# Altium PCB Health_module.PcbDoc
Units mm, origin at the board's own origin, x right, y up, seen from the top; angles counter-clockwise.
Board outline 18 x 33 mm, 2 copper layers (Top Layer, Bottom Layer); 29 components, 19 nets, 115 pads, 15 vias.
Unrouted connection lines stored in the file: 5.
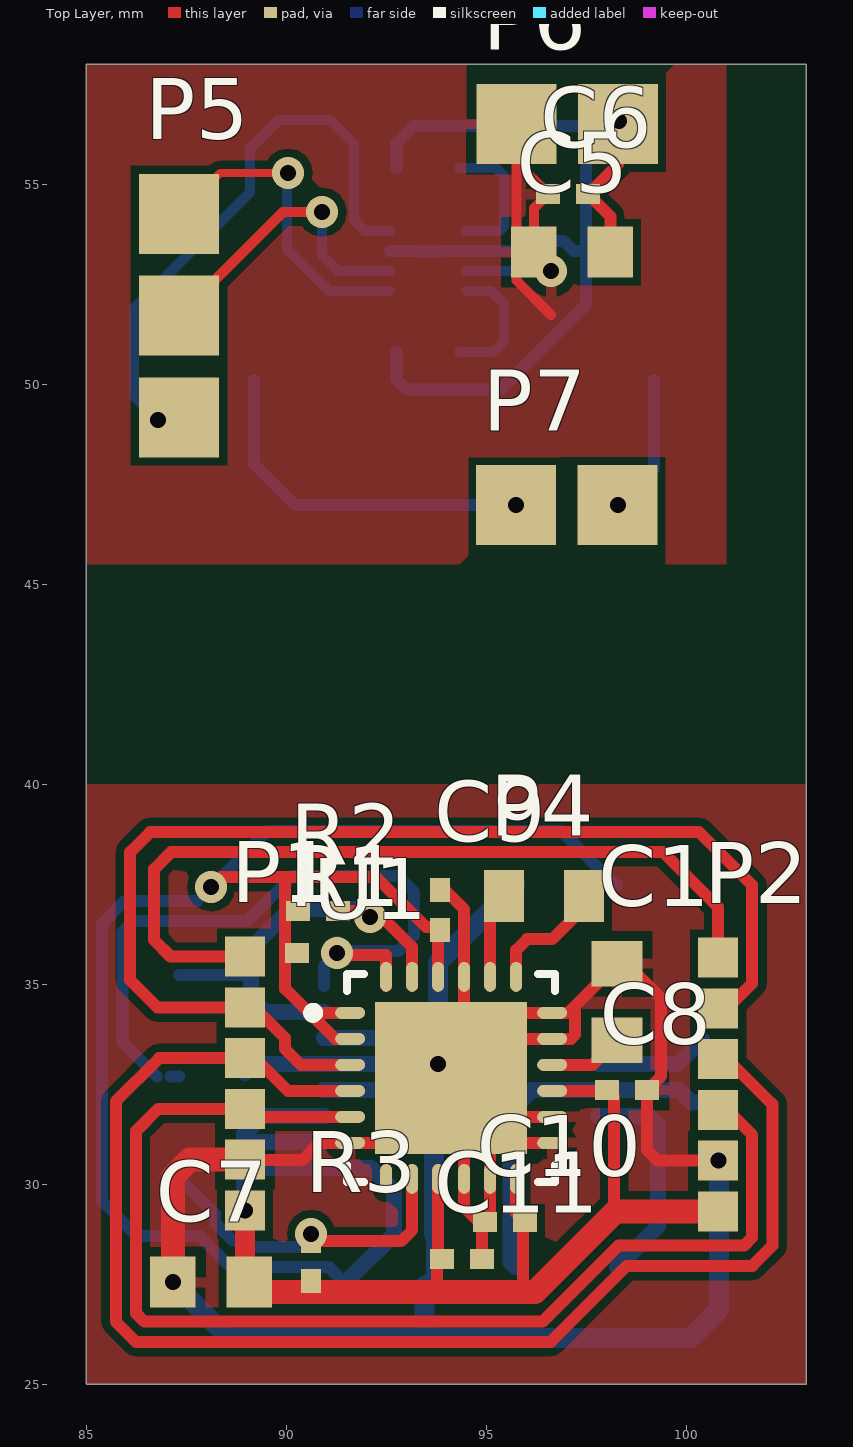
[diagram p0: Top Layer view]
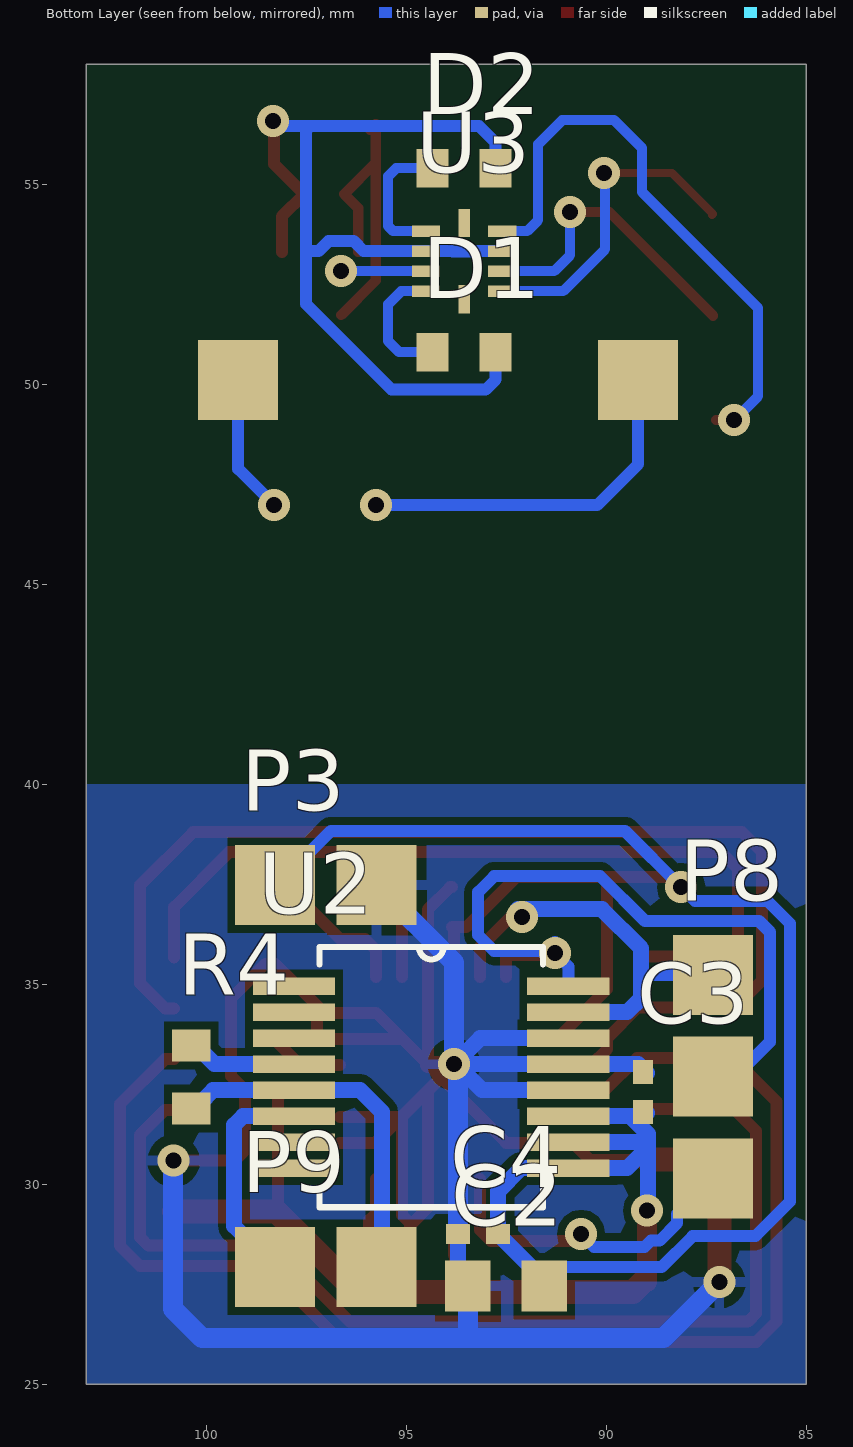
[diagram p1: Bottom Layer view, seen from below]

## Layer stack, top to bottom
Top Layer: signal copper 0.0356
Dielectric: dielectric 0.32, FR-4, Dk 4.8
Bottom Layer: signal copper 0.0356

## Board outline
85,58 103,58 103,25 85,25

## Design rules (kind name [scope] priority, off if disabled: settings)
Clearance [All] p1: gap=0.203
HoleSize [All] p1: absolutevalues=TRUE maxlimit=5 minlimit=0.3 maxpercent=80.000 minpercent=20.000
MinimumSolderMaskSliver [All] p1: minsoldermaskwidth=0
PolygonConnect [All] p1: connectstyle=Relief reliefconductorwidth=0.254 reliefentries=4 polygonreliefangle="90 Angle" airgapwidth=0.254
RoutingVias [All] p1: holewidth=0.4 width=0.8 viastyle="Through Hole" minholewidth=0.3 minwidth=0.6 maxholewidth=5 maxwidth=6
SilkToSilkClearance [All] p1: silktosilkclearance=0
SilkToSolderMaskClearance [IsPad] p1: minsilkscreentomaskgap=0 clearancetoexposedcopper=TRUE
SolderMaskExpansion [All] p1: expansion=0.051
Width [All] p1: maxlimit=3 minlimit=0.203 preferedwidth=0.3
24 further rules are at their usual default settings.

## Components (designator, comment, footprint, x,y, rotation, side; value= is the part's Value field where it differs from the comment)
C1 "10u" 0805 98.275,34.55 r270 top
C2 "10u" 0805 92.5,27.45 r180 bottom
C3 "Cap Semi" 0402 89.075,32.3 r270 bottom
C4 "Cap Semi" 0402 93.2,28.75 r180 bottom
C5 "10u" 0805 97.15,53.3 r0 top
C6 "Cap Semi" 0402 97.05,54.75 r0 top
C7 "10u" 0805 88.125,27.55 r0 top
C8 "Cap Semi" 0402 98.525,32.35 r180 top
C9 "Cap Semi" 0402 93.85,36.85 r270 top
C10 "Cap Semi" 0402 95.475,29.05 r0 top
C11 "Cap Semi" 0402 94.4,28.125 r180 top
D1 "IR" 0603 93.55,50.8 r0 bottom
D2 "RED" 0603 93.55,55.4 r0 bottom
P1 "InputConn" Goldpin6_1.27mm 88.975,33.15 r0 top
P2 "OutputConn" Goldpin6_1.27mm 100.8,33.125 r0 top
P3 "Sensor_board_supply" 2pinConn_2mmSquare_2.54mmSpaced 98.3,37.5 r90 bottom
P4 "Programming" GeckoProgramming 95.45,37.2 r0 top
P5 "PulseOximeter_conn" 3pinConn_2mmSquare_2.54spaced 87.325,54.25 r0 top
P6 "Sensor_board_supply" 2pinConn_2mmSquare_2.54mmSpaced 98.325,56.475 r270 top
P7 "AD5933_conn" 2pinConn_2mmSquare_2.54mmSpaced 95.725,47 r90 top
P8 "PulseOximeter_conn" 3pinConn_2mmSquare_2.54spaced 87.325,35.225 r180 bottom
P9 "AD5933_conn" 2pinConn_2mmSquare_2.54mmSpaced 98.3,27.95 r90 bottom
R1 "Res2" 0402 90.775,35.775 r180 top
R2 "Res2" 0402 90.8,36.825 r180 top
R3 "Res2" 0402 90.625,28.075 r270 top
R4 "Res2" 0603 100.375,32.675 r270 bottom
U1 "EFM32ZG110" QFN24_5x5_0.65 94.175,32.65 r0 top
U2 "AD5933" SSOP16 94.525,32.875 r180 bottom
U3 "Si1143" Si1143 93.55,53.025 r0 bottom

## Footprints (in the part's own frame and the unit in brackets; to place one, negate y for a bottom-side part, rotate by r counter-clockwise, add the part's x,y. Pads: shape width x height; smd on the part's side, far side on the other; paste and mask are expansions set on the pad)
2pinConn_2mmSquare_2.54mmSpaced [mm]
  rect 2x2 smd: 1(-0.025,-0.025) 2(-0.025,-2.565)
3pinConn_2mmSquare_2.54spaced [mm]
  rect 2x2 smd: 1(0,0) 2(0,-2.54) 3(0,-5.08)
0402 [mm] "Chip Capacitor, Body 1.0x0.5mm, IPC High Density"
  rect 0.6x0.5 smd: 1(-0.5,0) 2(0.5,0)
  body extent -0.55,-0.3 0.55,0.3, height 1.3
0603 [mm]
  rect 0.8x0.965 smd: 1(-0.787,0) 2(0.788,0)
0805 [mm]
  rect 1.14x1.27 smd: 1(-0.955,0) 2(0.955,0)
GeckoProgramming [mm]
  rect 1x1.3 smd: 1(0,0) 2(2,0)
Goldpin6_1.27mm [mm]
  rect 1x1 smd: 1(0,-3.81) 2(0,-2.54) 3(0,-1.27) 4(0,0) 5(0,1.27) 6(0,2.54)
QFN24_5x5_0.65 [mm]
  oval 0.75x0.3 smd: 1(-2.575,1.631) 2(-2.575,0.981) 3(-2.575,0.331) 4(-2.575,-0.319) 5(-2.575,-0.969) 6(-2.575,-1.619) 13(2.475,-1.619) 14(2.475,-0.969) 15(2.475,-0.319) 16(2.475,0.331) 17(2.475,0.981) 18(2.475,1.631)
  oval 0.3x0.75 smd: 7(-1.675,-2.519) 8(-1.025,-2.519) 9(-0.375,-2.519) 10(0.275,-2.519) 11(0.925,-2.519) 12(1.575,-2.519) 19(1.575,2.531) 20(0.925,2.531) 21(0.275,2.531) 22(-0.375,2.531) 23(-1.025,2.531) 24(-1.675,2.531)
  rect 3.8x3.8 smd: 25(-0.05,0.006)
  silkscreen extent -3.62,-2.59 2.55,2.61, body extent -2.63,-2.57 2.53,2.58, height 1
Si1143 [mil]
  rect 28x11.42 smd: 1(-37.5,27.53) 2(-37.5,7.84) 3(-37.5,-11.84) 4(-37.5,-31.53) 6(37.5,-31.53) 7(37.5,-11.84) 8(37.5,7.84) 9(37.5,27.53)
  rect 11.42x28 smd: 5(0,-39.5) 10(0,35.5)
SSOP16 [mil]
  rect 81x17 smd: 1(-129,81.57) 2(-129,55.98) 3(-129,30.39) 4(-129,4.8) 5(-129,-20.8) 6(-129,-46.39) 7(-129,-71.98) 8(-129,-97.57) 9(141,-97.57) 10(141,-71.98) 11(141,-46.39) 12(141,-20.8) 13(141,4.8) 14(141,30.39) 15(141,55.98) 16(141,81.57)
  silkscreen extent -104,-136 116,120

## Part data
C1 C2 C5 C7: library part "Cap Semi", "Capacitor (Semiconductor SIM Model)"
C3 C4 C6 C8 C9 C10 C11: "Capacitor (Semiconductor SIM Model)"
D1 D2: library part LED0, "Typical INFRARED GaAs LED"
P1 P2: library part MHDR1X6, "Header, 6-Pin"
P3 P4 P6: library part MHDR1X2, "Header, 2-Pin"
P5 P8: library part "Header 3"
P7 P9: library part "Header 2", "Header, 2-Pin"
R1 R2 R3 R4: "Resistor"

## Free pads (board coordinates)
  rect 2x2 smd far side: 2(89.2,50.1) 3(99.2,50.1)

## Via types
v1: diameter 0.8, hole 0.4, Top Layer to Bottom Layer, 15 vias

## Nets (pads, with @x,y where several pads share a name; then routed paths per layer and width w, separated by ;. In a path a pad name is that pad's centre, name@x,y a point inside that pad or via, vN(x,y) a via of type N, cw(c..) or ccw(c..) an arc to the next point about the centre after c; other vN are vias at no path point)
+5V: P1.6 P2.6 | length 20.3
  Top Layer w0.3: P1.6 87.11,35.69 86.7,36.1 86.7,37.875 87.122,38.297 99.428,38.297 100.8,36.925 P2.6
AD5933_C1: P7.1 pad.2 | length 9.1
  Bottom Layer w0.3: pad.2 89.2,48 90.225,46.975 v1(95.75,46.975)
AD5933_C2: P7.2 pad.3 | length 3.5
  Bottom Layer w0.254: v1(98.3,46.984) v1@98.3,47
  Bottom Layer w0.3: v1(98.3,46.984) 99.2,47.884 pad.3
GND: C1.1 C2.1 C3.1 C4.1 C5.1 C6.1 C7.1 C8.1 C9.1 C10.1 C11.1 P1.2 P2.2 P3.2 P6.2 U1.6 U1.10 U1.11 U1.13 U1.14 U1.17 U1.18 U1.21 U1.25 U2.12 U2.13 U2.14 U3.8 | length 97.1
  Top Layer w0.254: P6.2@95.9,56.36 P6.2 P6.2@95.76,55.54 ; C5.1 96.195,54.395 C6.1 P6.2@95.76,55.54 ; 96.625,51.725 95.76,52.59 P6.2@95.76,55.54
  Top Layer w0.3: P1.2 88.985,30.6 90.4,30.6 90.831,31.031 U1.6 92.5,31.031 U1.25 ; v1(93.8,32.997) U1.25@94.133,32.664 ; C9.1@93.85,37.425 93.899,37.425 94.453,36.871 94.453,35.184 U1.21 U1.25@94.45,32.981 ; C11.1 94.9,28.975 C10.1@94.875,29 ; U1.13 95.766,31.031 U1.25@95.116,31.681 ; U1.14 U1.25@95.116,31.681 ; P2.2 99.29,30.585 99.025,30.85 C8.1 99.375,32.7 99.375,34.65 98.52,35.505 C1.1 97.225,34.455 ; U1.25 U1.25@94.45,32.331 ; U1.25 U1.25@94.133,32.664 ; U1.25@94.133,32.664 U1.25@94.45,32.981 ; U1.25@94.133,32.664 U1.25@95.116,31.681 ; U1.25@94.45,32.331 U1.10 94.45,29.425 C10.1@94.875,29 ; U1.25@94.45,32.331 95.1,31.681 U1.11 95.1,29.225 C10.1@94.875,29 ; U1.25@94.45,32.981 U1.25@95.1,33.631 ; U1.25@95.1,33.631 U1.17 97.119,33.631 97.225,33.737 97.225,34.455 ; U1.25@95.1,33.631 95.75,34.281 U1.18 97.051,34.281 97.225,34.455
  Top Layer w0.4: v1(93.8,32.997) 94.428,32.997 94.431,33 U1.25@94.45,32.981
  Top Layer w0.5: P2.2 v1(100.815,30.585)
  Top Layer w0.6: v1(87.17,27.55) 87.17,30.195 87.585,30.61 P1.2
  Bottom Layer w0.254: U3.8 95.876,52.826 ; 95.877,52.825 v1(96.625,52.825)
  Bottom Layer w0.4: C3.1@88.975,32.775 89.197,32.997 U2.13 v1@93.75,32.997 ; U2.12 93.1,32.347 v1@93.75,32.997 ; U2.14 93.15,33.647 v1(93.8,32.997) ; C2.1 93.7,27.695 C4.1 ; v1@93.7,32.897 v1(93.8,32.997) ; v1@93.75,32.997 v1(93.8,32.997)
  Bottom Layer w0.5: v1(87.17,27.55) 88.57,26.15 93.455,26.15 ; C2.1 93.455,26.15 ; C4.1 v1@93.7,32.897 ; v1(93.8,32.997) 93.8,35.54 P3.2 ; v1(100.815,30.585) 100.825,30.575 100.825,26.875 100.1,26.15 93.455,26.15
INT: P5.3 P8.3 R3.1 U1.8 U3.4 | length 23
  Top Layer w0.254: v1(86.8,49.1) P5.3@87.255,49.1
  Top Layer w0.3: R3.1 92.875,28.575 93.15,28.85 U1.8
  Bottom Layer w0.254: v1(86.8,49.1) 86.2,49.7 86.2,51.9 89.1,54.8 89.1,55.9 89.8,56.6 91.1,56.6 91.7,56 91.7,54.1 91.974,53.826 U3.4
  Bottom Layer w0.3: P8.3 88.222,29.248 88.222,29.028 88.663,28.587 88.883,28.587 89.045,28.425 90.3,28.425 v1(90.625,28.75) v1@90.6,28.775
MODCONND0: P1.5 P2.5 U1.3 | length 29.6
  Top Layer w0.3: U1.3 90.369,32.981 89.975,33.375 89.975,33.65 89.205,34.42 P1.5 86.78,34.42 86.1,35.1 86.1,38.3 86.6,38.8 100.325,38.8 101.653,37.472 101.653,35.019 101.03,34.395 P2.5
MODCONND1: P1.4 P2.4 U1.4 | length 35.1
  Top Layer w0.3: U1.4 90.044,32.331 89.225,33.15 P1.4 86.825,33.15 85.744,32.069 85.744,26.56 86.245,26.059 96.619,26.059 98.519,27.959 101.655,27.959 102.156,28.46 102.156,31.998 101.03,33.125 P2.4
MODCONND2: P1.3 P2.3 U1.5 | length 30.3
  Top Layer w0.3: U1.5 89.174,31.681 P1.3 86.805,31.88 86.247,31.322 86.247,26.769 86.454,26.562 96.411,26.562 98.311,28.462 101.446,28.462 101.653,28.669 101.653,31.231 101.03,31.855 P2.3
NetC1_2: C1.2 U1.16 | length 1.9
  Top Layer w0.3: U1.16 97.661,32.981 C1.2
NetD1_2: D1.2 U3.9 | length 3.2
  Bottom Layer w0.254: D1.2 95.175,50.8 95.45,51.075 95.45,52 95.124,52.326 U3.9
NetD2_2: D2.2 U3.6 | length 3.4
  Bottom Layer w0.254: D2.2 95.25,55.4 95.45,55.2 95.45,53.95 95.326,53.826 U3.6
NetP4_1: P4.1 U1.20 | length 2.2
  Top Layer w0.3: U1.20 95.1,36.85 P4.1
NetP4_2: P4.2 U1.19 | length 3.1
  Top Layer w0.3: U1.19 95.75,35.85 96.025,36.125 96.65,36.125 97.45,36.925 P4.2
NetP9_1: P9.1 U2.6 | length 5.6
  Bottom Layer w0.4: U2.6 99.078,31.697 99.303,31.472 99.303,28.953 P9.1
NetR4_1: R4.1 U2.4 | length 2.9
  Bottom Layer w0.4: U2.4 99.784,32.997 R4.1@100.4,33.612
SCL: P5.2 P8.2 R1.1 U1.24 U2.16 U3.2 | length 26.2
  Top Layer w0.254: P5.2 89.915,54.3 v1(90.9,54.3)
  Top Layer w0.3: v1(91.275,35.775) 91.25,35.8 91.25,35.725 92.5,35.725 U1.24
  Bottom Layer w0.254: v1(90.9,54.3) 90.9,53.225 91.299,52.826 U3.2
  Bottom Layer w0.3: P8.2@86.775,32.685 85.904,33.556 85.904,36.303 86.179,36.578 89.028,36.578 90.15,37.7 92.8,37.7 93.2,37.3 93.2,36.225 92.8,35.825 91.5,35.825 91.275,36.05 v1(91.275,35.775) 90.944,35.444 U2.16 ; P8.2@87.115,32.685 P8.2
SDA: P5.1 P8.1 R2.1 U1.23 U2.15 U3.1 | length 20.2
  Top Layer w0.203: P5.1@87.35,54.225 P5.1 88.35,55.275 v1(90.05,55.275)
  Top Layer w0.3: R2.1@91.25,36.825 92.15,36.825 92.1,36.775 v1(92.1,36.675) ; v1@92.325,36.75 93.15,35.925 U1.23
  Bottom Layer w0.203: v1@90.025,55.025 90.275,55.275 v1(90.05,55.275)
  Bottom Layer w0.254: v1@90.025,55.025 90.025,53.375 91.074,52.326 U3.1
  Bottom Layer w0.3: P8.1 89.075,35.225 89.125,35.275
  Bottom Layer w0.4: U2.15 89.478,34.297 89.125,34.65 89.125,35.275 89.125,35.893 90.107,36.875 92.2,36.875 92.1,36.775 v1(92.1,36.675)
VCC: C2.2 C3.2 C4.2 C5.2 C6.2 C7.2 C8.2 C9.2 C10.2 C11.2 D1.1 D2.1 P1.1 P2.1 P3.1 P6.1 R1.2 R2.2 R3.2 U1.1 U1.2 U1.9 U1.12 U1.15 U1.22 U2.9 U2.10 U2.11 U3.3 U3.7 | length 106.9
  Top Layer w0.3: v1(88.125,37.425) 88.375,37.675 89.975,37.675 ; 90.575,34.281 U1.1 ; U1.2 91.225,33.631 89.975,34.881 89.975,37.675 ; 93.8,27.3 93.775,27.325 93.775,28.2 93.8,28.225 U1.9 ; U1.22 93.8,36.375 93.85,36.425 93.5,36.425 92.25,37.675 89.975,37.675 ; U1.12 95.75,29.275 95.925,29.1 95.925,27.825 95.925,27.25 ; U1.15 98.006,32.331 C8.2 98.2,32.175 98.2,29.275 ; C5.2 98.105,54.195 C6.2 98.3,55.5 P6.1
  Top Layer w0.4: P1.1@88.95,29.2 88.95,29.315 v1(88.975,29.34) 88.975,29.225 P1.1@88.95,29.2
  Top Layer w0.5: C7.2@88.975,27.55 P1.1@88.975,29.225
  Top Layer w0.6: C7.2 89.33,27.3 93.8,27.3 96.225,27.3 98.2,29.275 ; 98.24,29.315 P2.1
  Bottom Layer w0.3: C2.2 91.073,27.922 88.616,27.922 87.838,28.7 86.27,28.7 85.401,29.57 85.401,36.512 85.97,37.081 87.781,37.081 v1(88.125,37.425) 89.528,38.828 96.881,38.828 98.234,37.475 P3.1 ; U3.3 93.252,53.326 93.259,53.319 93.841,53.319 93.848,53.326 U3.7 96.061,53.326 96.313,53.578 96.937,53.578 97.189,53.326 97.4,53.326 97.5,53.426 ; D1.1 92.763,50.112 93.013,49.862 95.362,49.862 97.5,52 97.5,53.426 ; D2.1 92.763,56.037 93.175,56.45 97.4,56.45 ; v1(98.325,56.575) 98.2,56.45 97.4,56.45 ; 97.4,56.45 97.5,56.35 97.5,53.426
  Bottom Layer w0.4: v1(88.975,29.34) 88.975,29.275 88.95,29.3 88.95,30.925 ; C3.2@88.975,31.775 89.053,31.697 89.397,31.697 ; U2.10 89.072,31.047 88.95,30.925 ; U2.11 89.397,31.697 ; C2.2 91.545,27.595 C4.2 92.7,29.825 92.128,30.397 U2.9 89.478,30.397 88.95,30.925 ; 88.95,30.925 88.95,31.25 89.397,31.697
VIN: P9.2 R4.2 U2.5 | length 9.1
  Bottom Layer w0.4: P9.2 95.606,28.053 95.606,31.806 96.147,32.347 U2.5 99.828,32.347 100.138,32.037 R4.2@100.4,32.037
pads on no net: U1.7 U2.1 U2.2 U2.3 U2.7 U2.8 U3.5 U3.10

## Polygon pours and split planes (outlines as drawn)
GND on Top Layer "Top Layer-No Net" (solid, pour order 2): 85,58 101,58 101,45.5 85,45.5
GND on Top Layer "Top Layer-No Net" (solid, pour order 5): 85,40 103,40 103,25 85,25
GND on Bottom Layer "Top Layer-No Net" (solid, pour order 3): 85,40 103,40 103,25 85,25